# EAGLE board rgbsaber_control_v1.6 (EAGLE 5.10)
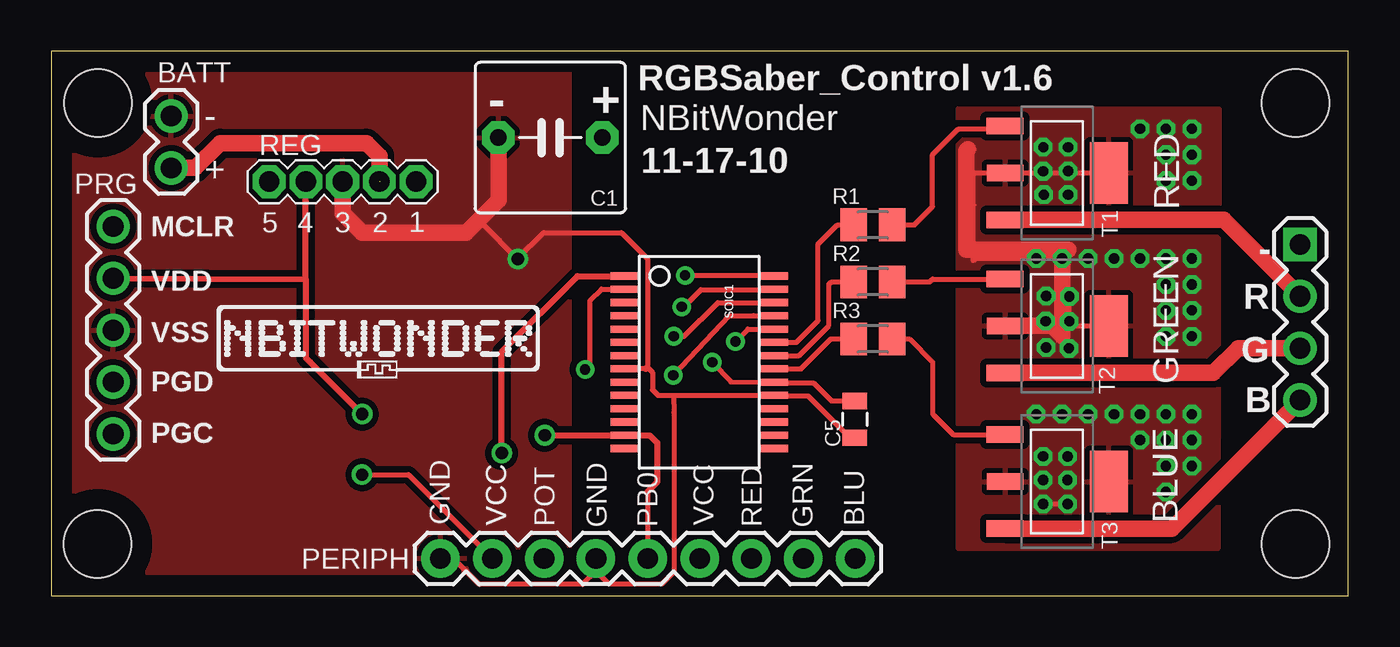
[diagram p0: board, top side]
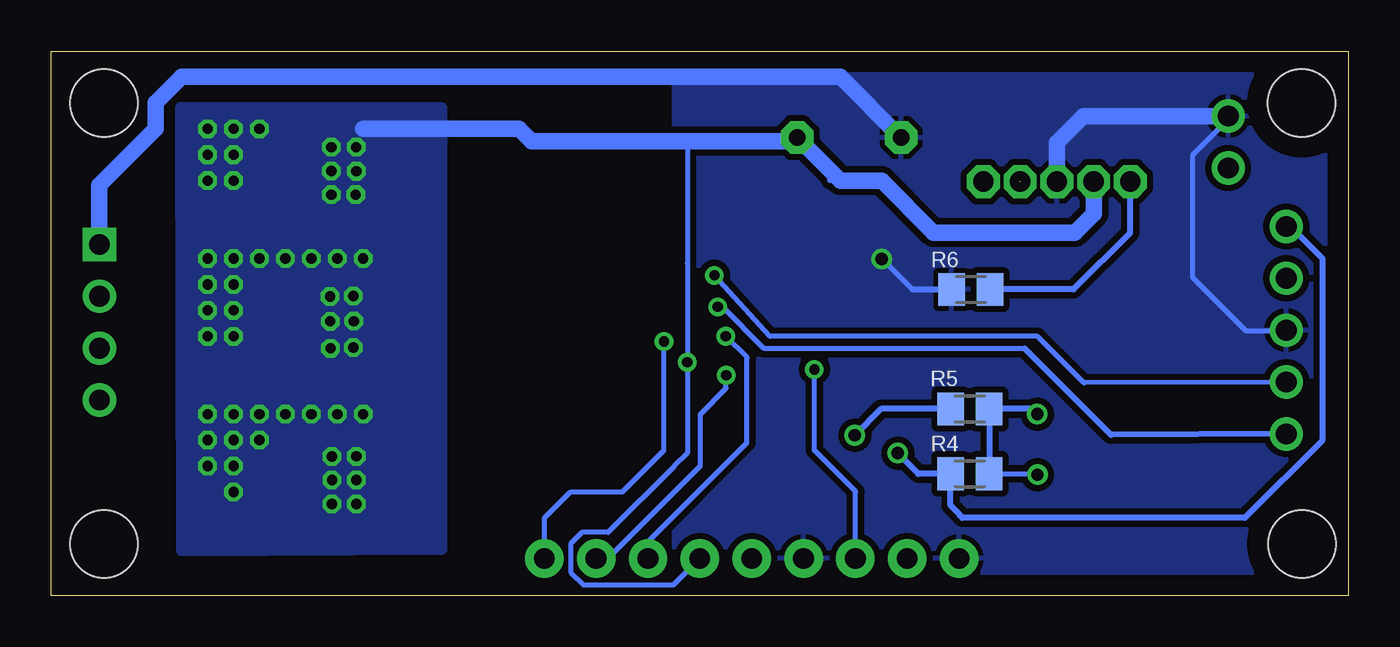
[diagram p1: board, bottom side, seen from below]

Size 63.55 x 26.67 mm. Coordinates in mm from the lower left corner, seen from the top.
Outline: 0,0 63.55,0 63.55,26.66 0,26.67 0,0
Copper layers (1*16): Top 0.035mm / dielectric 1.5mm / Bottom 0.035mm
Design rules "default *": minimum track width 10mil, minimum drill 24mil, track to track 8mil, track to pad 8mil, pad to pad 8mil, via to via 8mil, smd to smd 8mil, copper to edge 40mil, drill to drill 8mil, minimum pad ring 12mil, minimum via ring 8mil, stop-mask expansion 4mil, vias tented up to drill 20mil, thermal gap 10mil

## Footprints (pad centres in the part's own frame; a part is rotated, then mirrored left to right if it is on the bottom)
1X02 = drill 1.016 round: 1 0,0; 2 2.54,0
C5B7.2 = drill 0.813 pad 1.6 octagon: 1 -2.54,0; 2 2.54,0
0805 = smd 0.8 x 1.2: 1 -0.9,0; 2 0.9,0
1X04 = drill 1.016 square: 1 0,0 | drill 1.016 round: 2 2.54,0; 3 5.08,0; 4 7.62,0
1X09 = drill 1.016 pad 1.88 round: 1 0,0; 2 2.54,0; 3 5.08,0; 4 7.62,0; 5 10.16,0; 6 12.7,0; 7 15.24,0; 8 17.78,0; 9 20.32,0
1X05 = drill 1.016 round: 1 0,0; 2 2.54,0; 3 5.08,0; 4 7.62,0; 5 10.16,0
M0805 = smd 1.3 x 1.6: 1 -0.95,0; 2 0.95,0
1X05_2MM = drill 1 octagon: 1 0,0; 2 1.8,0; 3 3.6,0; 4 5.4,0; 5 7.2,0
SSOP-28 = smd 0.348 x 1.397: 1 -4.225,-3.656; 2 -3.575,-3.656; 3 -2.925,-3.656; 4 -2.275,-3.656; 5 -1.625,-3.656; 6 -0.975,-3.656; 7 -0.325,-3.656; 8 0.325,-3.656; 9 0.975,-3.656; 10 1.625,-3.656; 11 2.275,-3.656; 12 2.925,-3.656; 13 3.575,-3.656; 14 4.225,-3.656; 15 4.225,3.656; 16 3.575,3.656; 17 2.925,3.656; 18 2.275,3.656; 19 1.625,3.656; 20 0.975,3.656; 21 0.325,3.656; 22 -0.325,3.656; 23 -0.975,3.656; 24 -1.625,3.656; 25 -2.275,3.656; 26 -2.925,3.656; 27 -3.575,3.656; 28 -4.225,3.656
SOT223 = smd 0.8 x 1.8: BASE -2.3,-2.55; COLL 0,-2.54; EMIT 2.3,-2.55 | smd 3 x 1.85: HEAT 0,2.54
STAND-OFF = hole 3.302: 0,0

## Placement (x,y rotation side)
BATT  [1X02]  5.89,23.49 270 top
C1  100uf  [C5B7.2]  24.46,22.43 180 top
C5  .01uF  [0805]  39.37,8.64 270 top
LUX  [1X04]  61.18,17.2 270 top
PERIPH  M09  [1X09]  19.07,1.82 0 top
PRG  [1X05]  3.05,18.08 270 top
R1  6.65K  [M0805]  40.26,18.16 0 top
R2  3.3K  [M0805]  40.26,15.37 0 top
R3  3.3K  [M0805]  40.26,12.57 0 top
R4  10K  [M0805]  18.54,5.97 180 bottom
R5  10K  [M0805]  18.54,9.14 180 bottom
R6  250  [M0805]  18.49,15 180 bottom
REG  REG  [1X05_2MM]  10.68,20.28 0 top
SOIC1  P18F2221SSOP  [SSOP-28]  31.75,11.43 270 top
T1  FZTA14V1  [SOT223]  49.28,20.7 270 top
T2  FZTA14V1  [SOT223]  49.28,13.21 270 top
T3  FZTA14V1  [SOT223]  49.28,5.59 270 top
U$1  [STAND-OFF]  2.29,2.54 0 top
U$2  [STAND-OFF]  2.29,24.13 0 top
U$3  [STAND-OFF]  60.96,24.13 0 top
U$4  [STAND-OFF]  60.96,2.54 0 top
U$5  NBW_LOGO  [NBW_LOGO2]  7.62,10.16 0 top

## Library data of the parts
BATT C5 LUX PERIPH PRG U$1-U$4 = SparkFun
C1 = capacitor-wima
R1-R6 = resistor
REG U$5 = NBitWonder
SOIC1 T1-T3 = purduecer

## Nets
BLUE_IND: PERIPH.9 SOIC1.24
BLUE_LUX: LUX.4 T3.EMIT
GND: BATT.1 C1.2 C5.2 LUX.1 PERIPH.1 PERIPH.4 PRG.3 R6.2 REG.3 SOIC1.8 SOIC1.19
GREEN_IND: PERIPH.8 SOIC1.25
GREEN_LUX: LUX.3 T2.EMIT
MCLR: PRG.1 R4.2 SOIC1.1
N$1: R6.1 REG.1
N$4: R1.1 SOIC1.23
N$5: R1.2 T1.BASE
N$6: R2.1 SOIC1.22
N$7: R2.2 T2.BASE
N$8: R3.1 SOIC1.21
N$9: R3.2 T3.BASE
PB0: PERIPH.5 R5.2 SOIC1.13
PGC: PRG.5 SOIC1.27
PGD: PRG.4 SOIC1.28
POT: PERIPH.3 SOIC1.2
PWR: BATT.2 REG.4
RED_IND: PERIPH.7 SOIC1.26
RED_LUX: LUX.2 T1.EMIT
VCC: C1.1 C5.1 PERIPH.2 PERIPH.6 PRG.2 R4.1 R5.1 REG.2 SOIC1.20 T1.COLL T1.HEAT T2.COLL T2.HEAT T3.COLL T3.HEAT

## Tracks (layer width: path | path; a pad name or v marks a point on that pad's centre or on a via)
BLUE_IND  (via drill 0.51)
  Top 0.254: SOIC1.24 34.14,13.06 v33.53,12.45
  Bottom 0.254: v33.53,12.45 33.53,7.11 35.56,5.08 38.1,5.08 39.37,3.81 39.37,1.84 PERIPH.9
BLUE_LUX
  Top 0.813: T3.EMIT 54.89,3.29 LUX.4
GND  (via drill 0.6)
  Top 0.254: C5.2 39.13,7.74 37.08,9.78 35.43,9.78 SOIC1.19 30.49,9.81 | 30.49,9.81 30.37,9.81 29.73,9.81 29.46,10.08 29.46,10.94 29.21,11.18 29.21,16.51 27.94,17.78 24.13,17.78 22.86,16.52 v22.86,16.49 21.08,18.27 21.08,18.43 21.91,19.26 21.91,19.37 | SOIC1.8 29.13,11.1 | 26.69,1.2 PERIPH.4 | 26.69,1.2 27.32,0.57 29.91,0.57 30.51,1.17 30.51,8.97 30.49,9.81 | PERIPH.1 19.71,1.82 20.97,0.56 26.04,0.56 26.69,1.2
  Top 0.305: 29.21,11.18 29.13,11.1
  Top 0.813: C1.2 21.91,19.37 20.32,17.78 15.24,17.78 14.28,18.74 REG.3
  Bottom 0.254: BATT.1 5.89,23.32 7.62,21.59 7.62,15.57 5,12.95 3.31,12.95 PRG.3 | v22.86,16.49 22.83,16.49 21.35,15
  Bottom 0.305: 21.35,15 R6.2
  Bottom 0.813: LUX.1 61.18,20.1 58.42,22.86 58.42,24.13 57.15,25.4 24.89,25.4 C1.2 | BATT.1 12.97,23.49 14.29,22.17 REG.3
  pour Bottom (isolate 0.305): 33.02,0 33.02,26.67 0,26.67 0,0
  pour Top (isolate 0.305): 25.4,0 25.4,26.67 0,26.67 0,0
GREEN_IND  (via drill 0.51)
  Top 0.254: v30.48,10.8 33.24,13.72 34.42,13.72 SOIC1.25
  Bottom 0.254: PERIPH.8 36.28,1.82 31.75,6.35 31.75,8.89 30.48,10.16 v30.48,10.8
GREEN_LUX
  Top 0.813: T2.EMIT 56.93,10.91 58.15,12.12 LUX.3
MCLR  (via drill 0.6)
  Top 0.254: 28.08,15.66 27.94,15.66 27.95,15.66 SOIC1.1
  Top 0.305: v22.08,6.98 22.08,11.94 25.79,15.65 SOIC1.1
  Bottom 0.305: PRG.1 2.79,18.04 1.27,16.51 1.27,7.62 5.08,3.81 18.92,3.81 19.04,3.93 19.04,3.97 19.49,4.42 R4.2 21.07,5.97 v22.08,6.98
N$1
  Bottom 0.305: R6.1 13.47,15 10.69,17.78 REG.1
N$4
  Top 0.254: R1.1 38.53,18.16 37.58,17.21 37.58,13.47 36.51,12.4 SOIC1.23
N$5
  Top 0.254: R1.2 42.29,18.16 43.18,19.05 43.18,21.59 44.45,22.86 46.59,22.86 T1.BASE
N$6
  Top 0.254: R2.1 38.23,15.37 38.1,15.24 38.1,13.22 36.63,11.75 SOIC1.22
N$7
  Top 0.254: R2.2 43.05,15.37 43.18,15.5 46.72,15.5 T2.BASE
N$8
  Top 0.254: R3.1 38.2,12.57 36.74,11.11 SOIC1.21
N$9
  Top 0.254: R3.2 42.04,12.57 43.18,11.43 43.18,8.89 43.19,8.89 44.19,7.88 T3.BASE
PB0  (via drill 0.6)
  Top 0.254: 29.21,5.08 29.21,1.84 PERIPH.5
  Top 0.305: 29.21,5.08 29.69,5.56 29.69,7.49 29.33,7.86 SOIC1.13 v24.18,7.86
  Bottom 0.305: R5.2 22.89,9.14 v24.18,7.86
PGC  (via drill 0.5)
  Top 0.254: v30.9,14.15 30.98,14.14 31.83,14.99 35.39,14.99 SOIC1.27
  Bottom 0.254: 15.86,12.1 28.62,12.1 30.67,14.15 v30.9,14.15
  Bottom 0.305: PRG.5 11.63,7.88 15.86,12.1
PGD  (via drill 0.5)
  Top 0.254: v31.06,15.69 35.37,15.69 SOIC1.28
  Bottom 0.254: PRG.4 12.95,10.41 15.24,12.7 28.33,12.7 v31.06,15.69
POT  (via drill 0.5)
  Top 0.254: SOIC1.2 26.95,15.01 26.41,14.46 26.41,11.33 v26.16,11.08
  Bottom 0.254: v26.16,11.08 26.16,7.12 24.13,5.08 24.15,5.06 PERIPH.3
PWR  (1 unrouted)
  Top 0.813: BATT.2 7.07,20.95 8.29,22.16 15.46,22.16 16.1,21.52 16.1,20.29
RED_IND  (via drill 0.51)
  Top 0.254: SOIC1.26 32.66,14.36 30.99,12.69 30.52,12.69 v30.5,12.71
  Bottom 0.254: v30.5,12.71 | v30.5,12.71 29.45,11.65 29.46,11.63 29.46,7.48 34.31,2.63 PERIPH.7
RED_LUX
  Top 0.813: T1.EMIT 57.44,18.4 LUX.2
VCC  (via drill 0.5, 0.51, 0.6)
  Top 0.254: 49.29,13.21 T2.COLL 47.5,13.21 | 49.29,13.21 T2.HEAT | C5.1 38.22,9.54 37.34,10.41 35.45,10.41 SOIC1.20 33.3,10.47 v32.38,11.43 | T1.HEAT T1.COLL 45.19,20.7 45.19,19.14 45.17,19.14 45.17,16.41 45.27,16.51 v48.26,16.51 v49.53,16.51 v49.88,14.65 v49.87,13.43 49.29,13.21 | T3.COLL 46.72,5.61 | v49.79,4.49 v48.6,4.49 | v15.23,5.93 17.51,5.93 PERIPH.2
  Top 0.305: v15.24,8.89 12.7,11.43 12.47,11.65 12.47,15.49 | PRG.2 12.47,15.49 | 12.47,15.49 12.47,19.33 REG.2
  Top 0.813: T2.COLL 49.02,13.21 49.53,12.7 v49.53,16.51 49.53,16.64 49.83,16.94 44.83,16.94 44.83,21.79 44.91,21.87
  Bottom 0.254: 22.86,20.32 25.4,20.32 25.4,20.75 26.99,22.33 32.19,22.33 32.38,22.14 32.38,16.27 v32.38,11.43 32.38,6.99 33.02,6.35 36.27,3.1 37.54,3.1 38.1,2.54 38.1,1.16 37.47,0.53 33.07,0.53 PERIPH.6 | R4.1 15.28,5.97 v15.23,5.93
  Bottom 0.305: R4.1 R5.1 15.49,9.14 v15.24,8.89
  Bottom 0.813: 48.26,22.86 40.61,22.86 40.01,22.26 27.17,22.26 C1.1 24.89,20.32 22.86,20.32 20.32,17.78 13.4,17.78 12.47,18.71 12.47,20.27 REG.2
  other vias: 48.6,21.96 49.82,21.96 49.82,20.8 48.63,19.63 49.82,19.63 53.34,22.86 54.61,22.86 55.88,22.86 54.61,21.59 55.88,21.59 55.88,20.32 54.61,20.32 50.8,16.51 48.74,14.67 48.72,13.44 48.74,12.15 49.86,12.11 52.07,16.51 53.34,16.51 54.61,16.51 55.88,16.51 54.61,15.24 55.88,15.24 54.61,13.97 55.88,13.97 54.61,12.7 55.88,12.7 55.88,8.89 55.88,7.62 55.88,6.35 54.61,5.08 54.61,6.35 54.61,7.62 54.61,8.89 53.34,8.89 53.34,7.62 52.07,8.89 50.8,8.89 49.53,8.89 48.26,8.89 48.6,6.83 49.79,6.81 49.79,5.66 48.6,5.66 49.82,20.8 48.6,20.78
  pour Top (isolate 0.305): 44.45,2.29 44.45,23.88 57.2,23.84 57.15,2.29
  pour Bottom (isolate 0.305): 44.45,23.88 57.16,23.89 57.13,2.22 44.45,2.29

## Text on the board
tPlace: RGBSaber_Control v1.6 | - | - | + | NBitWonder | 11-17-10 | + | RED | MCLR | 5 | 4 | 3 | 2 | 1 | - | VDD | R | G | VSS | PGD | GREEN | B | PGC | BLUE | GND | VCC | VCC | POT | GND | PB0 | VCC | RED | GRN | BLU
_tNames: SOIC1 | SOIC1